# Altium PCB gateway.PcbDoc
Units mil, origin at the board's own origin, x right, y up, seen from the top; angles counter-clockwise.
Board outline 6000 x 4000 mil, 2 copper layers (Top Layer, Bottom Layer); 111 components, 89 nets, 380 pads, 164 vias.
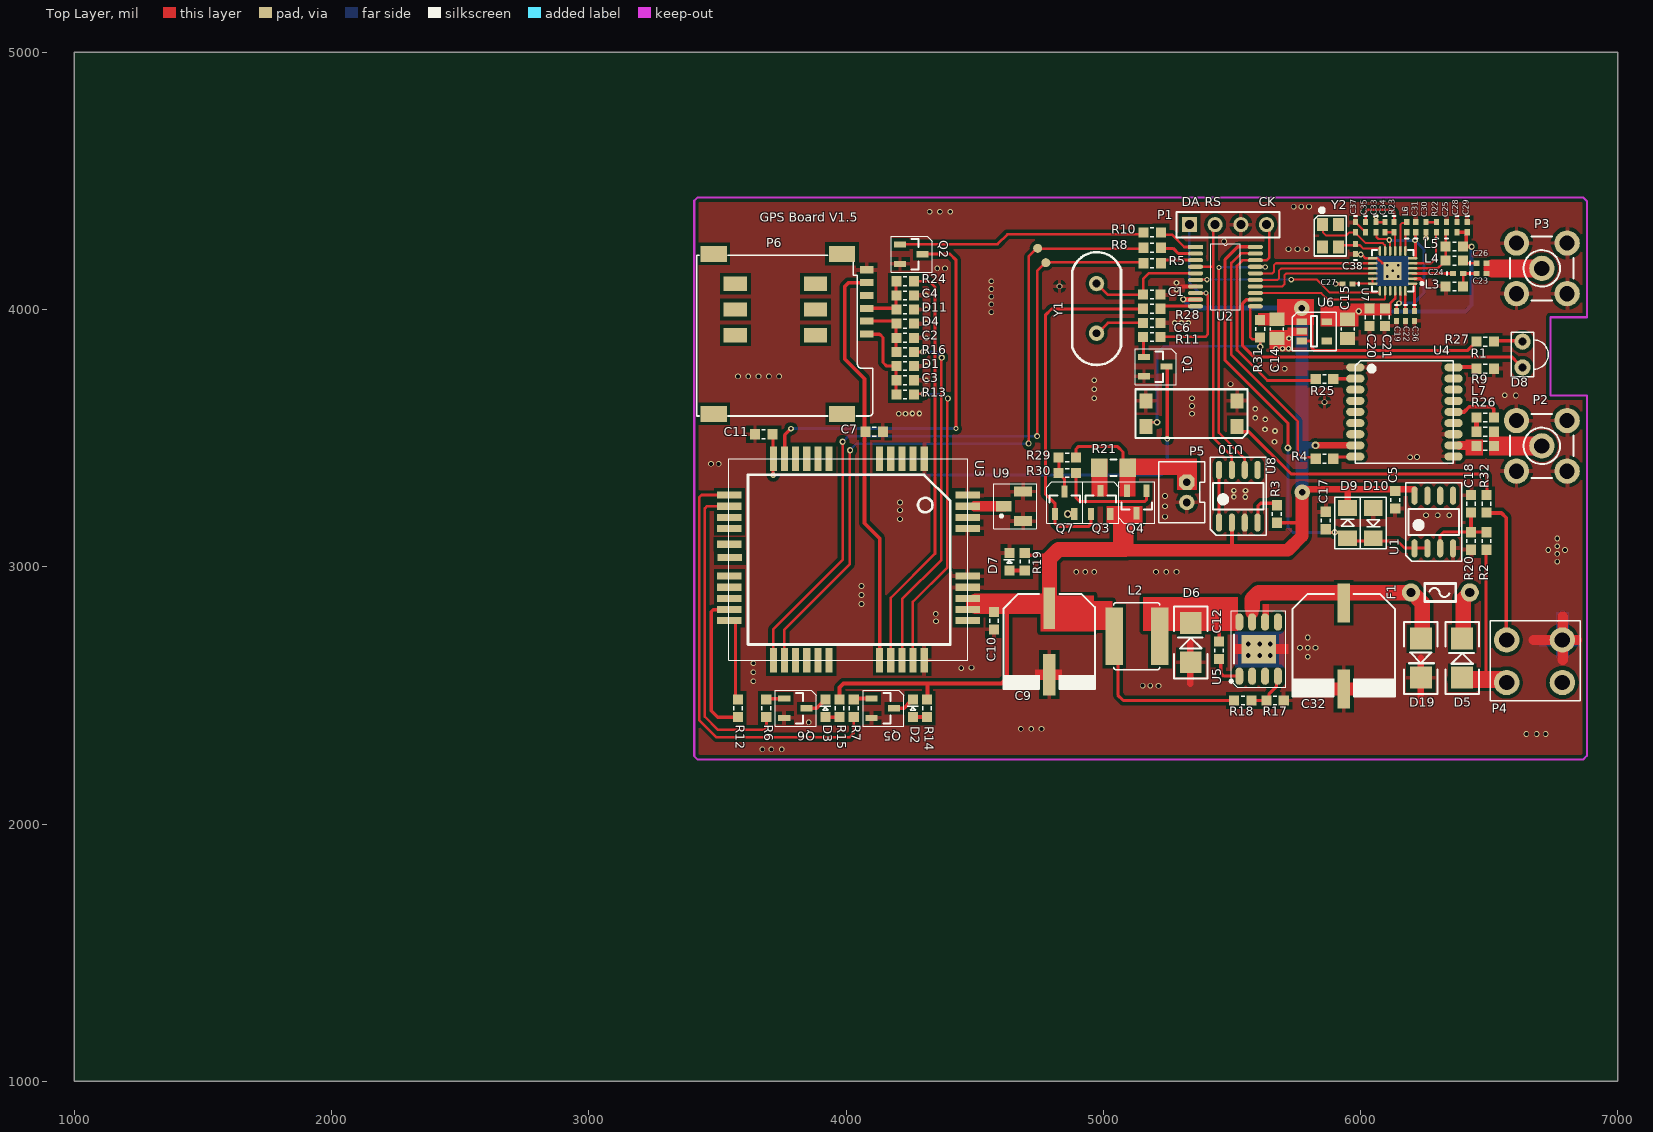
[diagram p0: Top Layer view]
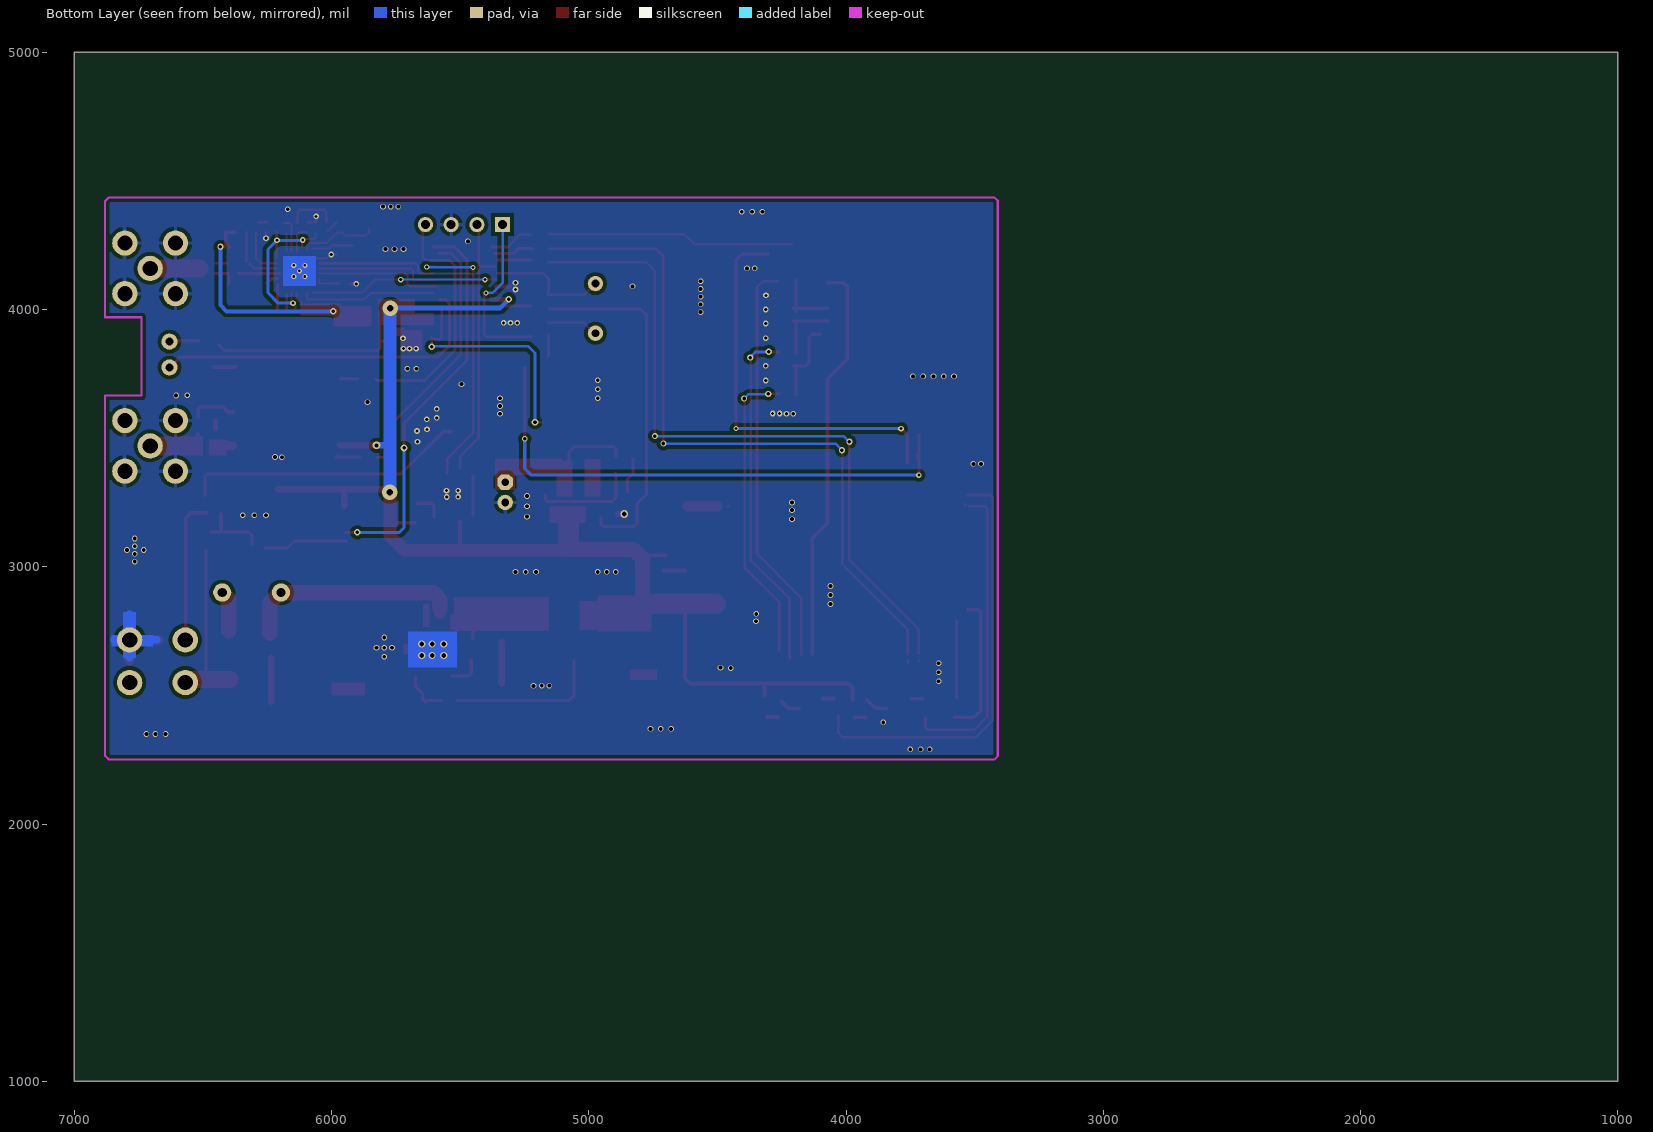
[diagram p1: Bottom Layer view, seen from below]

## Layer stack, top to bottom
Top Layer: signal copper 1.4
Dielectric: dielectric 12.6, FR-4, Dk 4.8
Bottom Layer: signal copper 1.4

## Board outline
1000,1000 7000,1000 7000,5000 1000,5000

## Design rules (kind name [scope] priority, off if disabled: settings)
Clearance [All] p1 off: gap=14
ComponentClearance [All] p1 off: gap=10 collisioncheckmode=3 verticalgap=10
PolygonConnect [All] p1: connectstyle=Relief reliefconductorwidth=15 reliefentries=4 polygonreliefangle="90 Angle"
RoutingVias [All] p1: holewidth=28 width=50 viastyle="Through Hole" minholewidth=10 minwidth=20 maxholewidth=100 maxwidth=120
SolderMaskExpansion [All] p1: expansion=4
TestPointUsage [All] p1: valid=0 allowmultiple=FALSE
Testpoint [All] p1: side=15 testpointundercomponent=TRUE minsize=40 maxsize=100 preferedsize=60 minholesize=0 maxholesize=40 preferedholesize=32 testpointgrid=1 style=1023 order=0123456789
Width [All] p1: maxlimit=200 minlimit=8 preferedwidth=10 toplayer_prefwidth=12 bottomlayer_prefwidth=12 minimp=50.000000 maximp=50.000000 favimp=50.000000
18 further rules are at their usual default settings.

## Components (designator, comment, footprint, x,y, rotation, side; value= is the part's Value field where it differs from the comment)
C1 "Cap" 0603 5189,4058 r0 top
C2 "Cap" 0603 4230,3890 r0 top
C3 "Cap" 0603 4230,3725 r180 top
C4 "Cap" 0603 4230,4055 r0 top
C5 "Cap" 0603 6135,3260 r270 top
C6 "Cap" 0603 5189,3948 r0 top
C7 "Cap" 0603 4110,3525 r180 top
C9 "Cap Pol3" C8X10-SMD 4790,2710 r270 top
C10 "Cap" 0603 4575,2790 r90 top
C11 "Cap" 0603 3680,3515 r180 top
C12 "Cap" 0603 5450,2675 r270 top
C14 "Cap" R0805 5675,3925 r270 top
C15 "Cap" R0805 5950,3925 r270 top
C17 "Cap" 0603 5865,3180 r270 top
C18 "Cap" 0603 6430,3245 r90 top
C19 "Cap" 0402-A 6140,3975 r270 top
C20 "Cap" 0603 6035,3970 r270 top
C21 "Cap" 0603 6095,3970 r270 top
C22 "Cap" 0402-A 6175,3975 r270 top
C23 "Cap" 0402-A 6470,4140 r0 top
C24 "Cap" 0402-A 6380,4140 r0 top
C25 "Cap" 0402-A 6335,4320 r90 top
C26 "Cap" 0402-A 6470,4180 r0 top
C27 "Cap" 0402-A 5950,4100 r180 top
C28 "Cap" 0402-A 6375,4320 r270 top
C29 "Cap" 0402-A 6415,4320 r270 top
C30 "Cap" 0402-A 6255,4320 r90 top
C31 "Cap" 0402-A 6215,4320 r90 top
C32 "Cap Pol3" C10-SMD 5935,2695 r270 top
C33 "Cap" 0402-A 6060,4320 r270 top
C34 "Cap" 0402-A 6095,4320 r270 top
C35 "Cap" 0402-A 6020,4320 r270 top
C36 "Cap" 0402-A 6210,3975 r270 top
C37 "Cap" 0402-A 5980,4320 r270 top
C38 "Cap" 0402-A 5980,4235 r90 top
D1 "RL0603E012M015K" 0603 4230,3780 r0 top
D2 "WORK" 0603-LED 4260,2450 r90 top
D3 "LINK" 0603-LED 3920,2450 r90 top
D4 "RL0603E012M015K" 0603 4230,3945 r0 top
D5 "SS54" SMA 6395,2645 r90 top
D6 "SS54" SMA 5340,2705 r90 top
D7 "PW" 0603-LED 4635,3020 r90 top
D8 "LED1" LED-1 6630,3825 r0 top
D9 "4148" LL34 5950,3170 r90 top
D10 "4148" LL34 6050,3170 r270 top
D11 "RL0603E012M015K" 0603 4230,4000 r0 top
D19 "SMAJ30A" SMA 6235,2645 r270 top
F1 "Fuse Thermal" PPTC-5.8 6425,2900 r180 top
L2 "Inductor" L-6045 5220,2730 r180 top
L3 "Inductor" 0603 6365,4090 r180 top
L4 "Inductor" 0603 6365,4190 r0 top
L5 "Inductor" 0603 6365,4245 r0 top
L6 "Inductor" 0402-A 6180,4320 r90 top
L7 "Inductor" 0603 6485,3525 r180 top
P1 "ICP" HDR1X4 5335,4330 r0 top
P2 "ANTA" SMB_V-RJ45 6705,3470 r180 top locked
P3 "ANTA" SMB_V-RJ45 6705,4160 r0 top locked
P4 "POW" 5569 6785,2550 r90 top
P5 "BAT" PH2.0-2P 5325,3250 r270 top
P6 "MircoSIM" "MICRO SIM" 3570,4100 r270 top
Q1 "NPN" SOT-23-NPN 5204,3778 r270 top
Q2 "NPN" SOT-23-NPN 4255,4215 r270 top
Q3 "PNP" SOT-23-PNP#1 4990,3250 r0 top
Q4 "PNP" SOT-23-PNP#2 5130,3250 r180 top
Q5 "NPN" SOT-23-NPN 4145,2450 r270 top
Q6 "NPN" SOT-23-NPN 3805,2450 r270 top
Q7 "NPN" SOT-23-NPN 4850,3250 r0 top
R1 "Res1" 0603 6485,3770 r180 top
R2 "Res1" 0603 6490,3100 r270 top
R3 "Res1" 0603 5675,3205 r270 top
R4 "Res1" 0603 5860,3420 r0 top
R5 "Res1" 0603 5190,4180 r0 top
R6 "Res1" 0603 3690,2450 r90 top
R7 "Res1" 0603 4030,2450 r90 top
R8 "Res1" 0603 5190,4240 r0 top
R9 "Res1" 0603 6485,3580 r0 top
R10 "Res1" 0603 5190,4300 r0 top
R11 "Res1" 0603 5189,3893 r0 top
R12 "Res1" 0603 3580,2450 r270 top
R13 "Res1" 0603 4230,3670 r0 top
R14 "Res1" 0603 4315,2450 r270 top
R15 "Res1" 0603 3975,2450 r270 top
R16 "Res1" 0603 4230,3835 r0 top
R17 "Res1" 0603 5668,2480 r180 top
R18 "Res1" 0603 5543,2480 r0 top
R19 "Res1" 0603 4695,3020 r270 top
R20 "Res1" 0603 6430,3100 r90 top
R21 "Res1" 3216[1206] 5040,3385 r0 top
R22 "Res1" 0402-A 6295,4320 r90 top
R23 "Res1" 0402-A 6130,4320 r270 top
R24 "Res1" 0603 4230,4110 r0 top
R25 "Res1" 0603 5860,3730 r0 top
R26 "Res1" 0603 6485,3470 r180 top
R27 "Res1" 0603 6485,3875 r180 top
R28 "Res1" 0603 5189,4003 r0 top
R29 "Res1" 0603 4860,3425 r180 top
R30 "Res1" 0603 4860,3365 r180 top
R31 "Res1" 0603 5610,3925 r90 top
R32 "Res1" 0603 6490,3245 r90 top
U1 "LM358D" SOIC8 6285,3175 r90 top
U2 "N76E003AT20" TSSOP20 5359,4243 r0 top
U3 "G3524" G3524 4245,3005 r270 top
U4 "L70-R" L-70R 5980,3775 r180 top
U5 "LM22676" ? 5604,2680 r90 top
U6 "XC6219B33" SOT23-5N 5820,3915 r0 top
U7 "A7139" QFN24N 6125,4150 r180 top
U8 "IMP706SESA" SOIC8 5525,3275 r90 top
U9 "IPEX" IPEX 4660,3235 r180 top
U10 "EL817" PCBComponent_1 5520,3545 r180 top
Y1 "XTAL" 49SD 4974,3908 r90 top
Y2 "3225-wy" XT3225 5915,4330 r270 top

## Footprints (in the part's own frame and the unit in brackets; to place one, negate y for a bottom-side part, rotate by r counter-clockwise, add the part's x,y. Pads: shape width x height; smd on the part's side, far side on the other; paste and mask are expansions set on the pad)
49SD [mil]
  round 60 hole 30: 1(0,0) 2(193,0)
  silkscreen extent -124,-95 315,94
0402-A [mm] "Chip Inductor; Body 1 x 0.5 mm (LxW typ)"
  rect 0.6x0.5 smd: 1(-0.5,0) 2(0.5,0)
  silkscreen extent -1.1,-0.15 -1.1,0.15
0603 [mm]
  rect 1x1 smd: 1(-0.864,0) 2(0.864,0)
  silkscreen extent -0.18,-0.43 0.18,0.43
0603-LED [mm]
  rect 1x1 smd: 1(-0.864,0) 2(0.864,0)
  silkscreen extent -0.18,-0.51 0.18,0.56
3216[1206] [mm] "Chip Resistor; Body 3.2 x 1.6 mm (LxW typ)"
  rect 1.6x1.8 smd: 1(-1.4,0) 2(1.4,0)
  silkscreen extent -0.3,-0.8 0.3,0.8
5569 [mm]
  round 2.5 hole 1.524: 1(0,0) 2(4.2,0) 3(4.2,5.5) 4(0,5.5)
  silkscreen extent -1.78,-1.78 6.1,7.11
C8X10-SMD [mm]
  rect 4.1x1.148 smd: 1(-3.277,0)
  rect 4.1x1.25 smd: 2(3.277,0)
  silkscreen extent -4.7,-4.5 4.7,4.5, body extent -4.65,-4.25 4.65,4.25, height 10.5
C10-SMD [mm]
  rect 3.85x1.25 smd: 1(-4.191,0) 2(4.318,0)
  silkscreen extent -5.08,-5.08 5.08,5.08
G3524 [mm]
  rect 2.4x0.7 smd: 1(-10.55,1.5) 2(-10.55,0.4) 3(-10.55,-0.7) 4(-10.55,-1.8) 5(-10.55,-2.9) 6(-10.55,-7.9) 7(-10.55,-9) 8(-10.55,-10.1) 9(-10.55,-11.2) 10(-10.55,-12.3) 11(-10.55,-13.4) 21(9.35,-13.4) 22(9.35,-12.3) 23(9.35,-11.2) 24(9.35,-10.1) 25(9.35,-9) 26(9.35,-7.9) 27(9.35,-2.9) 28(9.35,-1.8) 29(9.35,-0.7) 30(9.35,0.4) 31(9.35,1.5)
  rect 0.7x2.4 smd: 12(-6.95,-17.75) 13(-5.85,-17.75) 14(-4.75,-17.75) 15(-3.65,-17.75) 16(1.05,-17.75) 17(2.15,-17.75) 18(3.25,-17.75) 19(4.35,-17.75) 20(5.45,-17.75) 32(5.45,5.8) 33(4.35,5.8) 34(3.25,5.8) 35(2.15,5.8) 36(1.05,5.8) 37(-3.65,5.8) 38(-4.75,5.8) 39(-5.85,5.8) 40(-6.95,5.8) 41(-2.1,-17.75) 42(-0.8,-17.7)
  silkscreen extent -10.55,-17.8 9.35,5.8
HDR1X4 [mm] "Connector; Header; 4 Position"
  rect 1.5x1.5 hole 0.9: 1(0,0)
  round 1.5 hole 0.9: 2(2.54,0) 3(5.08,0) 4(7.62,0)
  silkscreen extent -1.27,-1.27 8.89,1.27
IPEX [mil] "SOT23, 3-Leads, Body 3.0x2.6mm (max), Pitch 0.95mm, IPC Medium Density"
  rect 59.06x41.34 smd: 1(46.5,-0.5)
  rect 70.87x39.37 smd: 2(-28.5,57.5) 3(-28.5,-57.5)
  silkscreen extent -80,-89 86,88
L-70R [mm]
  oval 1.8x0.8 smd: 1(0,0) 2(0,1.1) 3(0,2.2) 4(0,3.3) 5(0,4.4) 6(0,5.5) 7(0,6.6) 8(0,7.7) 9(0,8.8) 10(-9.7,8.8) 11(-9.7,7.7) 12(-9.7,6.6) 13(-9.7,5.5) 14(-9.7,4.4) 15(-9.7,3.3) 16(-9.7,2.2) 17(-9.7,1.1) 18(-9.7,0)
  silkscreen extent -9.65,-0.66 0,9.47
L-6045 [mm]
  rect 1.7x5.7 smd: 1(0,0) 2(4.5,0)
  silkscreen extent 0,-3.3 4.57,3.3
LED-1 [mm] "Typical RED GaAs LED; 2 Leads"
  round 1.6 hole 0.8: 1(0,1.27) 2(0,-1.27)
  silkscreen extent -1.12,-2.2 2.54,2.2
LL34 [mm] "MELF Diode, 2-Leads, Body 3.3x1.6mm, IPC Medium Density"
  rect 1.575x1.85 smd: 1(-1.5,0) 2(1.5,0)
  silkscreen extent -2.54,-1.27 2.54,1.27, body extent -1.65,-0.82 1.65,0.82, height 1.65
"MICRO SIM" [mm]
  rect 1.55x2.6 smd: 0(-2.95,10.53) 0(-2.95,-2.15) 0(12.85,10.53) 0(12.85,-2.15)
  rect 1.4x2.3 smd: 0(0,7.92) 0(0,0) 0(2.54,7.92) 0(2.54,0) 0(5.08,7.92) 0(5.08,0)
  rect 0.7x1.35 smd: 1(-0.12,12.955) 2(2.42,12.955) 3(4.96,12.955) 5(-1.39,12.955) 6(1.15,12.955) 7(3.69,12.955)
  silkscreen extent -2.82,-3.82 13.05,13.58
PCBComponent_1 [mm]
  rect 1.3x1.5 smd: 1(0,0) 2(0,-2.54) 3(9,-2.54) 4(9,0)
  round 0.635 on Top Overlay: 3(-1.651,0.635)
  silkscreen extent -1.02,-3.68 10.03,1.14
PH2.0-2P [mil]
  oct 60x60 hole 30: 1(-78.74,0)
  round 60 hole 30: 2(0,0)
  silkscreen extent -157,-110 79,70
PPTC-5.8 [mm]
  round 1.8 hole 0.92: 1(0,0) 2(5.8,0)
  silkscreen extent 1.4,-0.89 4.44,0.89
QFN24N [mm] "QFN, 24-Leads, Body 4.1x4.1mm (max), Pitch 0.50mm, IPC Medium Density"
  oval 0.95x0.25 smd: 1(-1.97,1.25) 2(-1.97,0.75) 3(-1.97,0.25) 4(-1.97,-0.25) 5(-1.97,-0.75) 6(-1.97,-1.25) 13(1.97,-1.25) 14(1.97,-0.75) 15(1.97,-0.25) 16(1.97,0.25) 17(1.97,0.75) 18(1.97,1.25)
  oval 0.25x0.95 smd: 7(-1.25,-1.97) 8(-0.75,-1.97) 9(-0.25,-1.97) 10(0.25,-1.97) 11(0.75,-1.97) 12(1.25,-1.97) 19(1.25,1.97) 20(0.75,1.97) 21(0.25,1.97) 22(-0.25,1.97) 23(-0.75,1.97) 24(-1.25,1.97)
  rect 1.8x1.8 smd: 25(0,0)
  silkscreen extent -3.03,-2.05 2.05,2.05, body extent -2.05,-2.05 2.05,2.05, height 0.8
R0805 [mm] "Chip Resistor, 2-Leads, Body 2.0x1.3mm, IPC Medium Density"
  rect 1.298x1.501 smd: 1(-0.95,0) 2(0.95,0)
  silkscreen extent -0.13,-0.64 0.13,0.64
SMA [mm] "Molded Diode, 2-Leads, Body 4.3x2.7mm, IPC Medium Density"
  rect 2.15x2.15 smd: 1(-1.93,0) 2(1.93,0)
  silkscreen extent -3.56,-1.65 3.56,1.65, body extent -2.28,-1.42 2.29,1.42, height 2.95
SMB_V-RJ45 [mm] "Connector; SMB Straight"
  round 2.5 hole 1.5: 1(0,0) 2(-2.5,2.5) 2(-2.5,-2.5) 2(2.5,2.5) 2(2.5,-2.5)
  silkscreen extent -3.15,-3.15 3.15,3.15
SOIC8 [mm]
  oval 1.8x0.6 smd: 1(-2.625,1.905) 2(-2.625,0.635) 3(-2.625,-0.635) 4(-2.625,-1.905) 5(2.575,-1.905) 6(2.575,-0.635) 7(2.575,0.635) 8(2.575,1.905)
  silkscreen extent -3.89,-2.74 3.84,2.77, body extent -2.03,-2.5 1.97,2.5, height 1.76
SOT23-5N [mm]
  rect 1.05x0.65 smd: 1(-1.225,0.95) 2(-1.225,0) 3(-1.225,-0.95) 4(1.225,-0.95) 5(1.225,0.95)
  silkscreen extent -2.16,-1.91 2.16,1.91, body extent -0.87,-1.5 0.88,1.5, height 1.1
SOT-23-NPN [mm]
  rect 0.6x1.2 smd: 1(0.95,-1.15) 2(-0.95,-1.15) 3(0,1.067)
  silkscreen extent -1.78,-2.03 1.78,2.03, body extent -1.5,-0.7 1.5,0.7, height 1.1
SOT-23-PNP#1 [mm]
  rect 0.6x1.2 smd: 1(0.95,-1.15) 2(-0.95,-1.15)
  rect 0.6x1.118 smd: 3(0,1.168)
  silkscreen extent -1.78,-2.03 1.78,2.03, body extent -1.5,-0.7 1.5,0.7, height 1.1
SOT-23-PNP#2 [mm]
  rect 0.6x1.2 smd: 1(0.95,-1.15) 2(-0.95,-1.15) 3(0,1.067)
  silkscreen extent -1.78,-2.03 1.78,2.03, body extent -1.5,-0.7 1.5,0.7, height 1.1
TSSOP20 [mm]
  rect 1.5x0.4 smd: 1(0,0)
  oval 1.5x0.4 smd: 2(0,-0.65) 3(0,-1.3) 4(0,-1.95) 5(0,-2.6) 6(0,-3.25) 7(0,-3.9) 8(0,-4.55) 9(0,-5.2) 10(0,-5.85) 11(5.9,-5.85) 12(5.9,-5.2) 13(5.9,-4.55) 14(5.9,-3.9) 15(5.9,-3.25) 16(5.9,-2.6) 17(5.9,-1.95) 18(5.9,-1.3) 19(5.9,-0.65) 20(5.9,0)
  silkscreen extent 1.48,-6.18 4.42,0.33
XT3225 [mm]
  rect 1.3x1.1 smd: 1(0,-1.6) 2(2.2,-1.6) 3(2.2,0) 4(0,0)
  silkscreen extent -1.6,-2.39 3.1,0.76
? [mm]
  oval 1.7x0.8 smd: 1(-2.675,1.905) 2(-2.675,0.635) 3(-2.675,-0.635) 4(-2.675,-1.905) 5(2.675,-1.905) 6(2.675,-0.635) 7(2.675,0.635) 8(2.675,1.905)
  rect 2.8x3.4 smd: 9(0,0)
  silkscreen extent -3.78,-2.7 3.77,2.82

## Part data
C1 C2 C3 C4 C5 C6 C7 C10 C11 C12 C14 C15 C17 C18 C19 C20 C21 C22 C23 C24 C25 C26 C27 C28 C29 C30 C31 C33 C34 C35 C36 C37 C38: "Capacitor"
C9: library part "Cap Pol1", "Polarized Capacitor (Radial)"
C32: "Polarized Capacitor (Surface Mount)"
D1: library part SMF05C
D2 D3 D7 D8: library part LED2, "Typical RED, GREEN, YELLOW, AMBER GaAs LED"
D4 D11 D19: library part "Diode 18TQ045", "Schottky Rectifier"
D5 D6 D9 D10: library part "Diode 1N5408", "3 Amp Medium Power Silicon Rectifier Diode"
F1: "Thermal Fuse"
P1: library part "Header 5", "Header, 5-Pin"
P2 P3: library part SMB, "SMB Straight Connector"
P4 P5: library part "Header 2", "Header, 2-Pin"
Q1 Q2 Q5 Q6 Q7: library part 2N5551, "NPN General Purpose Amplifier"
Q3 Q4: library part 2N5401, "PNP General Purpose Amplifier"
R1 R2 R3 R4 R5 R6 R7 R8 R9 R10 R11 R12 R13 R14 R15 R16 R17 R18 R19 R20 R21 R22 R23 R24 R25 R26 R27 R28 R29 R30 R31 R32: "Resistor"
U1: "Dual Low-Power Operational Amplifier"
U2: library part ATmega8-16AC, "8-Bit AVR Microcontroller with 8K Bytes of In-System Programmable Flash Memory"
U3: library part USR-GM3
U4: library part UM220-III
U5: library part LM22676-5.0
U6: library part LP5907
U8: library part MAX706RCSA, "+3V Voltage Monitoring, Low-Cost, 礟 Supervisory Circuit"
U10: library part Optoisolator1, "4-Pin Phototransistor Optocoupler"
Y1: "Crystal Oscillator"
Y2: library part XTAL, "Crystal Oscillator"

## Free pads (board coordinates)
  round 35 smd: 2(4745,4238) 2(4777,4182)

## Via types
v1: diameter 22, hole 15, Top Layer to Bottom Layer, 89 vias
v2: diameter 22, hole 12, Top Layer to Bottom Layer, 35 vias
v3: diameter 24, hole 14, Top Layer to Bottom Layer, 9 vias
v4: diameter 20, hole 12, Top Layer to Bottom Layer, 6 vias
v5: diameter 28, hole 18, Top Layer to Bottom Layer, 6 vias
v6: diameter 26, hole 14, Top Layer to Bottom Layer, 5 vias
v7: diameter 20, hole 10, Top Layer to Bottom Layer, tented top, 5 vias
v8: diameter 22, hole 11, Top Layer to Bottom Layer, 3 vias
v9: diameter 60, hole 25, Top Layer to Bottom Layer, 2 vias
v10: diameter 30, hole 18, Top Layer to Bottom Layer, 1 vias
v11: diameter 30, hole 16, Top Layer to Bottom Layer, 1 vias
v12: diameter 24, hole 13, Top Layer to Bottom Layer, 1 vias
v13: diameter 22, hole 13, Top Layer to Bottom Layer, 1 vias

## Nets (pads, with @x,y where several pads share a name; then routed paths per layer and width w, separated by ;. In a path a pad name is that pad's centre, name@x,y a point inside that pad or via, vN(x,y) a via of type N, cw(c..) or ccw(c..) an arc to the next point about the centre after c; other vN are vias at no path point)
+3.3V: C15.1 C20.1 C21.1 C28.2 C29.2 L5.2 U6.5 U7.22 | length 916.2
  Top Layer w10: C21.1@6105.41,4013.59 6134.88,4042.71 U7.22@6135,4064
  Top Layer w14: C28.2 6411,4300.31 6411,4257 L5.2@6409,4255 ; L5.2@6398,4243 6399.14,4243.08 L5.2@6403.6,4243.41 ; L5.2@6402,4245 v12@6432,4245 ; L5.2@6403.22,4245.7 6403.51,4243.92 L5.2@6403.6,4243.41 ; L5.2@6404,4241 L5.2@6403.6,4243.41
  Top Layer w15: C20.1@6034.97,4004.93 C20.1@6037,4005 ; C20.1@6041,4004 C21.1
  Bottom Layer w15: v3(5993,3993) 6408,3993 6432,4017 v12@6432,4243
  other v12: 6432,4244
+4.2V: C5.1 C9.1 C10.2 C14.1 D9.2 L2.2 Q3.1 Q4.3 R3.2 R14.1 R15.1 R18.1 R19.1 R27.2 R31.2 U1.8 U2.9 U3.33 U3.34 U4.8 U6.1 U6.3 U8.2 | length 6230.6
  Top Layer w12: L2.2@5057,2638 5057,2501 5078,2480 R18.1@5514,2480 ; U6.3@5770,3878 U6.3@5771.78,3877.98 ; U6.3@5778,3877.6 5811.4,3877.6 ; 5812,3943 5812,3849 5821,3840 6415,3840 R27.2@6438,3863
  Top Layer w15: R15.1@3973,2481 R15.1@3973.22,2484.12 ; R15.1@3975,2488 3975,2531 3990,2546 4605,2546 4626,2567 4626,2837 ; R14.1@4317,2499 4317,2542 ; R19.1@4701,3045 4783,3045 ; 5501,3076 U8.2@5501,3174 ; U8.2@5501.89,3171.55 U8.2@5502,3174 ; R3.2 5773,3171
  Top Layer w18: v6@5311,4039 5359,4039 U2.9@5379,4039
  Top Layer w25: v9@5783,3301 U1.8@6209,3301 ; v11@5828,3472 U4.8@5969,3472 ; D9.2@5950,3235 5950,3296
  Top Layer w50: 5092,3064 5717,3064 5773,3120 v9@5773,3291
  Top Layer w60: C9.1@4791,2870 4791,3032 4826,3067 5086,3067 5089,3070
  Top Layer w80: 4506,2857 C9.1@4775,2857
  Bottom Layer w18: v6@5310,4040 5344,4006 v9@5773,4006
  Bottom Layer w25: 5780,3472 v11(5825,3472)
  Bottom Layer w50: v9(5773,3290) v9@5773,4006
  other v6: 5311,4040
  other v9: 5772,4005
ACC: P4.3 R32.1 | length 554.9
  Top Layer w14: R32.1@6487,3209 6548,3209 6567,3190 P4.3@6567,2723
ACC_T: R31.1 U2.11 U10.4 | length 905.3
  Top Layer w10: U10.4@5179.67,3562 v6@5207,3562 ; U2.11@5572,4010 5572,3892 5580,3884 R31.1@5609,3884 ; v6@5610.59,3854.16 R31.1@5610.59,3892
  Bottom Layer w10: v6(5209,3562) 5209,3831 5235,3857 v6@5611,3857
  other v6: 5610,3855
BAT: R28.2 U2.10 | length 124
  Top Layer w12: R28.2@5224,4013 U2.10@5348,4013
D1: D8.2 U2.12 | length 1319.4
  Top Layer w12: U2.12@5579,4038 5556,4038 5542,4024 5542,3859 5585,3816 6588,3816 6614,3790 D8.2@6625,3790
DOG: U2.17 U8.6 | length 1051.8
  Top Layer w10: v4@5449,4164 5449,3522 5550,3421 U8.6@5550,3361 ; U2.17@5596,4166 v4(5630,4166)
  Bottom Layer w10: 5462,4165 v4@5635,4165
  other v4: 5450,4164
GIO1: U2.6 U7.19 | length 730.2
  Top Layer w8: U2.6@5359.95,4116 v4@5404,4116 ; v4@5729,4117 5829,4117 5880,4066 U7.19@6073,4066
  Bottom Layer w8: v4@5411,4116 v4@5732,4116
  other v4: 5403,4116 5731,4116
GIO2: U2.13 U7.20 | length 527.4
  Top Layer w8: U2.13@5603,4063 5604,4064 5848,4064 5873,4039 6092,4039 6096,4043 U7.20@6096,4065
GND: C1.2 C2.2 C3.1 C4.2 C5.2 C6.2 C7.1 C9.2 C10.1 C11.2 C14.2 C15.2 C17.1 C18.2 C19.2 C20.2 C21.2 C22.2 C25.2 C27.2 C28.1 C29.1 C30.1 C31.2 C32.2 C33.1 C34.1 C35.2 C36.2 C37.1 C38.1 D1.2 D4.2 D6.1 D7.2 D10.1 D11.2 D19.2 L3.2 P1.3 P2.2 P3.2 P4.2 P5.2 P6.5 Q1.1 Q2.1 Q5.1 Q6.1 Q7.1 R1.1 R17.1 R20.1 U1.4 U2.7 U3.1 U3.31 U3.35 U3.36 U3.37 U3.38 U3.40 U4.1 U4.10 U4.12 U5.6 U5.9 U6.2 U7.2 U7.13 U7.25 U8.3 U9.2 U9.3 U10.2 U10.3@5165.67,3645 | length 1410.3
  Top Layer w9: C37.1@5981.5,4338.5 C35.2@6015,4305
  Top Layer w10: C38.1@5984,4214 6005,4214 6020,4199 6066,4199 6085,4180 U7.25@6099,4180 ; C33.1@6063.31,4339.69 C34.1@6094,4339.69
  Top Layer w12: v2@5901.67,4099.88 C27.2@5930,4099.88 ; C33.1@6060,4340.69 v2(6060,4362) ; v2(6255,4277) C30.1@6255,4301
  Top Layer w13: U7.2@6211,4120 6233,4120 6251,4102
  Top Layer w15: 5305,4090 U2.7@5360,4090
  Top Layer w25: v10(4862,3205) Q7.1@4886,3205 ; 5339,2546 5339,2706 ; 6235,2475 6235,2646
  Top Layer w40: 6673,2715 6841,2715 ; 6786,2639 6786,2807
  Bottom Layer w30: 6679,2716 6847,2716 ; 6785,2647 6785,2815
  other v1: 3675,2290 3710,2290 3750,2290 6645,2350 6685,2350 6720,2350 4680,2370 4720,2370 4760,2370 3855,2395 5215,2537 5153,2538 5183,2538 3640,2555 3640,2590 4448,2606 4488,2608 3640,2625 5795,2650 5765,2685 5795,2685 5825,2685 5795,2725 4350,2788 4349,2817 4060,2855 4060,2890 4060,2925 4895,2980 4930,2980 4965,2980 5205,2980 5245,2980 5285,2980 6765,3020 6765,3050 6730,3065 6795,3065 6765,3080 6765,3110 4210,3185 5240,3195 6255,3200 6300,3200 6345,3200 4210,3220 5240,3235 4210,3250 5240,3275 3475,3400 3505,3400 6193,3426 6220,3427 5345,3595 5345,3625 5860,3640 4965,3655 5345,3655 6604,3666 6561,3667 4965,3690 5495,3710 4965,3725 3580,3740 3620,3740 3660,3740 3700,3740 3740,3740 5670,3770 5705,3770 4565,3990 4565,4020 4565,4050 4565,4080 4830,4090 4565,4110 4355,4160 4385,4160 5720,4235 5755,4235 5790,4235 5470,4265 4325,4380 4365,4380 4405,4380 6170,4390 5740,4400 5770,4400 5800,4400
  other v2: 5552,3271 5508,3272 5508,3296 5553,3296 5666,3486 5668,3528 5629,3534 5630,3573 5591,3579 4205,3595 4231,3595 4258,3596 4285,3596 5591,3614 4312,3724 4312,3781 5671,3848 5697,3848 5721,3848 5722,3888 4312,3889 4312,3946 5278,3948 5304,3948 5331,3948 4312,4000 4311,4055 5285,4078 5904,4100 5285,4104 6001,4214
  other v5: 5564,2655 5609,2655 5649,2655 5564,2700 5609,2700 5649,2700
  other v7: 6103.35,4128.35 6146.65,4128.35 6125,4150 6103.35,4171.65 6146.65,4171.65
GPS_RST: R4.1 U2.19 | length 1024.8
  Top Layer w10: U2.19@5585,4218 5535,4218 5498,4181 5498,3824 5756,3566 5756,3441 5772,3425 R4.1@5825,3425
GPS_TX: R25.2 U4.2 | length 67
  Top Layer w12: R25.2@5897,3731 U4.2@5964,3731
GSM_PW: R10.2 U2.1 | length 172.9
  Top Layer w10: R10.2@5226,4291 5267,4291 5315,4243 U2.1@5379,4243
GSM_RST: P1.1 R11.2 U2.8 | length 668.2
  Top Layer w10: R11.2@5224,3894 5397,3894 5407,3904 5407,4055 5398,4064 U2.8@5380,4064 ; U2.8@5359,4066 U2.8@5359.13,4065.99
  Bottom Layer w10: P1.1@5335,4323 5335,4104 5374,4065 v4@5399,4065
  other v4: 5399,4064
GSM_RX: pad.2@4745,4238 R8.1 U3.22 | length 2795.2
  Top Layer w10: U3.22@3760,2627 U3.22@3760.12,2636.9 ; U3.22@3760.75,2660 3760.75,2755.75 4015,3010 v3@4015,3455 ; v3(4710,3479) 4710,4206 4741,4237 R8.1@5153,4237
  Bottom Layer w10: v3@4016,3457 4019,3457 4041,3479 v3@4709,3479
  other v3: 4016,3453
GSM_TX: pad.2@4777,4182 R5.1 U3.21 | length 2769.9
  Top Layer w10: U3.21@3717,2634 U3.21@3717.02,2636.89 ; U3.21@3717.44,2662 3717.44,2757.44 3987,3027 v3(3987,3486) ; v3@4744,3510 4744,4151 4776,4183 R5.1@5157,4183
  Bottom Layer w10: v3@3988,3486 4010,3508 v3(4743,3508)
ICPCK: P1.4 R25.1 U2.18 | length 941.7
  Top Layer w10: P1.4@5646,4324 5646,4203 5634,4191 5541,4191 5520,4170 5520,3842 5638,3724 R25.1@5824,3724 ; R25.1@5828,3730 R25.1@5827.99,3730.15
LINK_LED: Q6.2 R6.2 | length 43
  Top Layer w15: R6.2@3702,2487 Q6.2@3745,2487
NetC1_1: C1.1 U2.5 Y1.2 | length 467.9
  Top Layer w10: Y1.2 5017,4058 C1.1@5154,4058 ; C1.1@5157,4058 5156.99,4058.15 5155,4084 5155,4119 5176.64,4140.64 U2.5@5355,4140.64
NetC6_1: C6.1 Y1.1 | length 197
  Top Layer w10: Y1.1@4977,3907 5018,3948 C6.1@5157,3948
NetC11_1: C11.1 Q1.3 U3.11 | length 2102.7
  Top Layer w10: U3.11@3721,3420.12 U3.11@3722,3435
  Top Layer w12: v2(3717,3356) C11.1@3717,3514 ; v13@5249,3499 Q1.3@5249,3774
  Bottom Layer w12: v2(3717,3356) 5223,3356 5249,3382 v13@5249,3494
  other v13: 5249,3497
NetC12_1: C12.1 D6.2 L2.1 U5.8 | length 52
  Top Layer w12: C12.1@5451,2720 5451,2772
NetC12_2: C12.2 U5.1 | length 133
  Top Layer w12: C12.2@5457,2639 5457,2587 5469,2575 U5.1@5533,2575
NetC18_1: C18.1 R2.1 R20.2 U1.3 | length 267.8
  Top Layer w12: U1.3@6309,3085 6309,3121 6323,3135 6470,3135
  Top Layer w15: R20.2@6430,3140 C18.1@6430,3205
NetC22_1: C22.1 U7.24 | length 69.4
  Top Layer w9: C22.1@6174,3993 U7.24@6174,4062.44
NetC23_1: C23.1 C24.2 L3.1 | length 84.3
  Top Layer w10: L3.1@6400,4096.69 6400,4130 ; C24.2@6400,4140 C23.1@6451,4140
NetC23_2: C23.2 C26.2 P3.1 | length 188
  Top Layer w70: 6513,4160 P3.1@6701,4160
NetC24_1: C24.1 U7.3 | length 158
  Top Layer w10: U7.3@6202,4140 C24.1@6360,4140
NetC25_1: C25.1 L4.1 L5.1 U7.4 | length 226.5
  Top Layer w10: U7.4@6214,4160 6300,4160 L4.1@6318,4178 ; L4.1@6331,4185 C25.1@6331,4300
NetC26_1: C26.1 L4.2 | length 43
  Top Layer w10: L4.2@6407,4180 C26.1@6450,4180
NetC27_1: C27.1 U7.17 U7.18 | length 96
  Top Layer w8: C27.1@5970,4101 U7.18@6046,4101 ; U7.18@6046,4101.04 U7.17@6046,4121
NetC30_2: C30.2 R22.2 | length 31.3
  Top Layer w10: C30.2@6252.69,4339.69 6284,4339.69
NetC32_1: C32.1 D19.1 F1.2 U5.7 | length 864.8
  Top Layer w50: 5579,2821 5579,2846
  Top Layer w60: 5579,2840 5579,2874 5604,2899 F1.2@6196,2899 ; F1.2@6198,2902 6240,2860 D19.1@6240,2741
NetC34_2: C34.2 R23.2 U7.9 | length 98
  Top Layer w8: U7.9@6135,4223 R23.2@6135,4292
  Top Layer w10: C34.2@6097,4300 R23.2@6126,4300
NetC35_1: C35.1 R23.1 | length 198.2
  Top Layer w10: C35.1 6020,4378 6030,4388 6122,4388 6131,4379 R23.1@6131,4338
NetC36_1: C36.1 U7.1 | length 104.3
  Top Layer w10: C36.1 U7.1@6210,4099
NetC37_2: C37.2 U7.11 Y2.1 | length 304.1
  Top Layer w8: Y2.1@5855,4313 5855,4299 5867,4287 5944,4287 5957,4300 5978,4300 6020,4258 6087,4258 6095,4250 U7.11@6095,4231
NetC38_2: C38.2 U7.12 Y2.3 | length 160.2
  Top Layer w8: Y2.3@5919,4250 5998,4250 6011,4237 U7.12@6073.79,4237
NetD2_1: D2.1 R14.2 | length 43
  Top Layer w15: D2.1@4265,2416 R14.2@4308,2416
NetD2_2: D2.2 Q5.3 | length 79.8
  Top Layer w15: Q5.3@4182,2450 4225,2450 D2.2@4251,2476
NetD3_1: D3.1 R15.2 | length 43
  Top Layer w15: D3.1@3924,2415 R15.2@3967,2415
NetD3_2: D3.2 Q6.3 | length 88.3
  Top Layer w15: Q6.3@3843,2450 3886,2450 D3.2@3918,2482
NetD5_2: D5.2 F1.1 | length 163.7
  Top Layer w60: D5.2@6399,2750.36 6399,2873 F1.1@6428,2902
NetD7_1: D7.1 R19.2 | length 82
  Top Layer w15: D7.1@4625,2986 R19.2@4707,2986
NetD8_1: D8.1 R27.1 | length 112
  Top Layer w14: R27.1@6516,3878 D8.1@6628,3878
NetL6_1: L6.1 U7.7 | length 71
  Top Layer w8: U7.7@6175,4227 L6.1@6175,4298
NetL6_2: L6.2 U7.8 | length 138.2
  Top Layer w8: U7.8@6155,4225 6155,4330 6162,4337 L6.2@6185.31,4337
NetL7_1: L7.1 P2.1 R26.1 | length 32
  Top Layer w15: R26.1@6520,3485 L7.1@6520,3517
NetL7_2: L7.2 R9.1 | length 32
  Top Layer w20: L7.2@6451,3536 R9.1@6451,3568
NetP5_1: P5.1 Q4.1 R21.2 R29.1 | length 258.4
  Top Layer w12: R29.1@4894,3428 4894,3458 4903,3467 5056,3467 5077,3446 R21.2@5077,3413
NetQ1_2: Q1.2 R11.1 | length 84
  Top Layer w12: Q1.2@5156,3817 R11.1@5156,3901
NetQ2_2: Q2.2 R10.1 | length 958.4
  Top Layer w10: Q2.2@4211.32,4254 4589,4254 4627,4292 R10.1@5154,4292
NetQ2_3: Q2.3 U3.10 | length 1578.5
  Top Layer w12: U3.10@3762,3404 3762,3513 v2@3785,3536 ; Q2.3@4300,4216 4404,4216 4428,4192 v4@4428,3535
  Bottom Layer w12: v2@3785,3537 v4(4427,3537)
  other v2: 3786,3537
NetQ3_2: Q3.2 Q7.2 R28.1 | length 1392.8
  Top Layer w12: Q7.2@4812,3208 Q7.2@4812.06,3204.71 ; Q3.2@4952,3192 4952,3165 4944,3157 4824,3157 4813,3168 4813,3245 4775,3283 4775,3978 4799,4002 R28.1@5155,4002
NetQ3_3: Q3.3 R21.1
NetQ4_2: Q4.2 R30.1 | length 394.4
  Top Layer w12: R30.1@4894,3361 4894,3268 4908,3254 5162,3254 5168,3260 Q4.2@5168,3279 ; R30.1@4895.99,3364.85 R30.1@4896,3365
NetQ7_3: Q7.3 R29.2 R30.2 | length 139.1
  Top Layer w12: R29.2@4828,3421 4828,3361 4850,3339 Q7.3@4850,3291
NetR1_2: R1.2 U4.18 | length 86
  Top Layer w15: U4.18@6373,3777 R1.2@6459,3777
NetR3_1: R3.1 U8.4 | length 112.6
  Top Layer w12: U8.4@5601,3192 5601,3236 5612,3247 R3.1@5665,3247
NetR4_2: R4.2 U4.9 | length 93
  Top Layer w12: R4.2@5889,3427 U4.9@5982,3427
NetR5_2: R5.2 U2.3 | length 132
  Top Layer w12: R5.2@5223,4192 U2.3@5355,4192
NetR6_1: R6.1 U3.13 | length 1185
  Top Layer w10: U3.13@3520,3236 3460,3236 3451,3227 3451,2417 3502,2366 3681,2366 3691,2376 R6.1@3691,2413
NetR7_1: R7.1 U3.12 | length 1669.9
  Top Layer w10: U3.12@3527,3279 3439,3279 3429,3269 3429,2405 3497,2337 4014,2337 4030,2353 R7.1@4030,2421
NetR8_2: R8.2 U2.2 | length 159.3
  Top Layer w12: R8.2@5216,4238 5272,4238 5292,4218 U2.2@5367,4218
NetR9_2: R9.2 U4.14 | length 181
  Top Layer w15: U4.14@6381,3602 6403,3602 6423,3622 6509,3622 6518,3613 R9.2@6518,3581
NetR12_1: R12.1 U3.20 | length 301
  Top Layer w12: R12.1@3571,2490 U3.20@3571,2791
NetR13_2: R13.2 U3.30 | length 1173.6
  Top Layer w10: U3.30@4260,2674 4260,2864 4394,2998 v3@4394,3653 ; R13.2@4260,3672 v3@4303,3672
  Bottom Layer w10: v3@4302,3671 4379,3671 4389,3661 v3@4389,3656
  other v3: 4396,3654 4302,3672
NetR16_2: R16.2 U3.29 | length 1365.2
  Top Layer w10: U3.29@4218,2645 4218,2874 4371,3027 v3@4371,3814 ; R16.2@4257,3835 v3@4300,3835
  Bottom Layer w10: v3@4299,3835 4352,3835 4371,3816 v3@4371,3806
  other v3: 4372,3813 4300,3836
NetR17_2: R17.2 R18.2 U5.4 | length 169.6
  Top Layer w12: R18.2@5571,2480 R17.2@5629,2480 ; R17.2@5634,2473 5644,2483 5644,2504 5673,2533 U5.4@5673,2567 ; U5.4@5670.93,2574.59 U5.4@5671,2576
NetR22_1: R22.1 U7.5 | length 189.9
  Top Layer w8: U7.5@6212,4180 6275,4180 6294,4199 R22.1@6294,4299
NetR24_2: R24.2 U3.28 | length 1589.9
  Top Layer w10: U3.28@4174,2658 4174,2879 4346.12,3051.12 4346.12,4086.88 4323,4110 R24.2@4266,4110
NetR26_2: R26.2 U4.11 | length 32
  Top Layer w35: U4.11@6385,3472 6417,3472
NetR32_2: R32.2 U10.1 | length 1108.2
  Top Layer w12: U10.1@5533,3525 5566,3525 5730,3361 6484,3361 6492,3353 R32.2@6492,3275
NetU3_39: U3.39 U9.1 | length 118.9
  Top Layer w10: U3.39@4456.5,3235.5 4456.31,3235.32 U3.39@4459,3235.32
  Top Layer w40: U3.39@4500,3235 U9.1@4616,3235
NetU8_1: U8.1 U8.8 | length 157
  Top Layer w12: U8.1@5450,3199 U8.8@5450,3356
RESEVER: P4.1
RST: P1.2 U2.4 U8.7 | length 1029.8
  Top Layer w10: U2.4@5365,4166 5425,4166 ; P1.2@5438,4319 5428,4309 5428,3501 5500,3429 5500,3386 U8.7@5502,3384
SCK_7139: U2.15 U7.15 | length 487.2
  Top Layer w8: U2.15@5597,4115 5678,4115 5683,4120 5683,4150 5693,4160 U7.15@6048,4160
SCS: U2.16 U7.14 | length 477.8
  Top Layer w8: U2.16@5603,4140 5657,4140 5663,4146 5663,4172 5671,4180 U7.14@6049,4180
SDIO: U2.14 U7.16 | length 497.6
  Top Layer w8: U2.14@5594,4089 5695,4089 5704,4098 5704,4133 5711,4140 U7.16@6050,4140
SIM_CLK: C3.2 D1.1 P6.3 R13.1 | length 335.2
  Top Layer w12: P6.3@4100,3904 4131,3904 4144,3891 4144,3794 4158,3780 D1.1@4206,3780 ; R13.1@4195,3665 D1.1@4195,3786
SIM_DAT: C2.1 D4.1 P6.7 R16.1 | length 265.6
  Top Layer w12: P6.7@4070.04,3954.72 D4.1@4206,3954.72 ; R16.1@4195,3825 D4.1@4195,3954.69
SIM_RST: C4.1 D11.1 P6.2 R24.1 | length 261
  Top Layer w12: P6.2@4070.04,4005 D11.1@4206,4005 ; D11.1@4195,3990 R24.1@4195,4115
VDA: C19.1 C31.1 C33.2 U7.6 U7.10 U7.23 | length 705.7
  Top Layer w8: C33.2@6062,4296 6062,4282 6070,4274 6107,4274 6115,4266 U7.10@6115,4243 ; C19.1@6141,3995 6141,4016 6155,4030 U7.23@6155,4067.47
  Top Layer w12: U7.6@6214,4201 C31.1@6214,4300.31
  Bottom Layer w12: v8@6112,4269 v8(6212,4269) 6247,4234 6247,4065 6207,4025 6152,4025 v8@6151,4024
  other v8: 6150,4025 6112,4270
VDD3.0: R12.2 U3.19 | length 554.7
  Top Layer w12: U3.19@3528,2833 3484,2833 3476,2825 3476,2440 3501,2415 R12.2@3580,2415
VIN: D5.1 P4.4 R2.2 | length 653
  Top Layer w12: 6488,2583 R2.2@6488,3063
  Top Layer w65: D5.1@6394,2562 P4.4@6567,2562
VSA: C17.2 D9.1 D10.2 U1.1 U1.2 U2.20 | length 1910.4
  Top Layer w12: U2.20@5605,4244 5523,4244 5474,4195 5474,3802 5718,3558 v6@5718,3461 ; C17.2@5855,3134 D9.1@5946,3134 ; D9.1@5940,3100 6144,3100 6171,3073 U1.2@6259,3073 ; U1.2@6259,3074 U1.2@6259.05,3071.62
  Bottom Layer w12: v6@5718,3463 5718,3152 5736,3134 v6(5900,3134)
  other v6: 5718,3462
VSIM: C7.2 P6.1 U3.27 | length 1569.5
  Top Layer w15: P6.1@4073,4104 4010,4104 3995,4089 3995,3808 4072,3731 4072,3169 4131,3110 U3.27@4131,2660
WORK_LED: Q5.2 R7.2 | length 43
  Top Layer w15: R7.2@4046,2488 Q5.2@4089,2488
pads on no net: P6.0 P6.6 U1.5 U1.6 U1.7 U3.2 U3.3 U3.4 U3.5 U3.6 U3.7 U3.8 U3.9 U3.14 U3.15 U3.16 U3.17 U3.18 U3.23 U3.24 U3.25 U3.26 U3.32 U3.41 U3.42 U4.3 U4.4 U4.5 U4.6 U4.7 U4.13 U4.15 U4.16 U4.17 U5.2 U5.3 U5.5 U6.4 U7.21 U8.5 U10.3@5585,3520 Y2.2 Y2.4

## Polygon pours and split planes (outlines as drawn)
GND on Top Layer "Bottom Layer-No Net" (solid, remove dead copper): 5530,3800 5550,3780 6000,3780 6000,3470 6020,3450 5980,3490 5580,3490
GND on Top Layer "Bottom Layer-No Net" (solid, remove dead copper): 4620,4330 5180,4330 5260,4250 5150,4140 5150,3890 4670,3890 4660,3880
GND on Top Layer "Bottom Layer-No Net" (solid, remove dead copper): 3146,4566 6924,4566 6924,2134 6891,2101 6857,2135 3297,2135
GND on Bottom Layer "Bottom Layer-No Net" (solid, remove dead copper): 3001,4588 3068,4655 6885,4655 6980,4655 7030,4605 7042,4593 7042,1967 3163,1967 3135,1995

## Keep-outs
Keep-Out Layer:
  lines w8: 3410,2264 3410,4423 3422,4435 6867,4435 6880,4422 6880,3970 6739,3970 6739,3665 6880,3665 6880,2265 6865,2250 3424,2250 3410,2264

## Other copper
Top Layer:
  rectangle net GND: 4735,2560 4840,2600
  rectangle net GND: 5620,2765 5645,2855
  rectangle net GND: 5640,2660 5720,2700
  rectangle net GND: 5510,2660 5560,2700
  rectangle net GND: 5870,2500 6000,2550
  rectangle net GND: 5716,3898 5795,3930
  rectangle net GND: 5647,3840 5732,3921
  rectangle net +4.2V: 5037,3058 5118,3202
  rectangle net +4.2V: 5013,3170 5152,3236
  rectangle net +4.2V: 5676,3939 5820,4040
  rectangle net +4.2V: 5601,3938 5704,3986
  rectangle net +3.3V: 5961,3976 6120,4024
  rectangle net +3.3V: 5845,3935 5992,4013
  rectangle net +4.2V: 4781,2755 5036,2867
  rectangle net +4.2V: 4756,2748 4964,2889
  rectangle net NetC12_1: 5488,2756 5540,2816
  rectangle net NetC12_1: 5155,2750 5524,2882
  rectangle net NetP5_1: 5286,3298 5364,3411
  rectangle net NetP5_1: 5104,3356 5364,3421
  rectangle net NetP5_1: 5064,3273 5126,3414
  rectangle net NetQ3_3: 4955,3274 5017,3418
  rectangle net NetL7_1: 6499,3432 6728,3507
  rectangle net NetR26_2: 6409,3432 6477,3495
Bottom Layer:
  rectangle net GND: 6760,2645 6810,2825
  rectangle net GND: 6695,2690 6855,2735
  rectangle net GND: 6061,4091 6189,4208
  rectangle net GND: 5513,2609 5703,2749

## Silkscreen, mask and mechanical layers (free items; w line width, h text height)
Top Overlay:
  text "DA" at 5305,4390 h60
  text "RS" at 5395,4390 h60
  text "CK" at 5605,4390 h60
  text "GPS Board V1.5" at 3665,4330 h60